# EAGLE board RotaryEncoder (EAGLE 6.4)
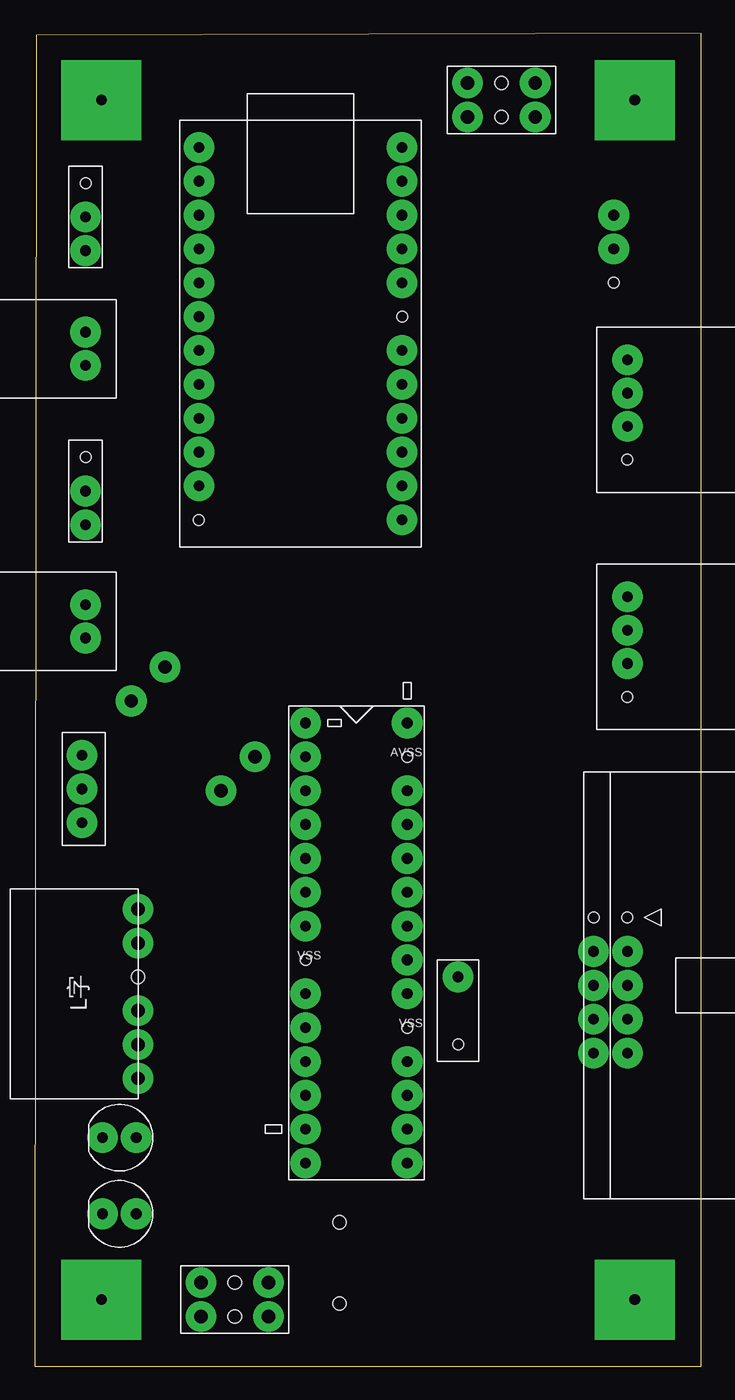
[diagram p0: board, top side]
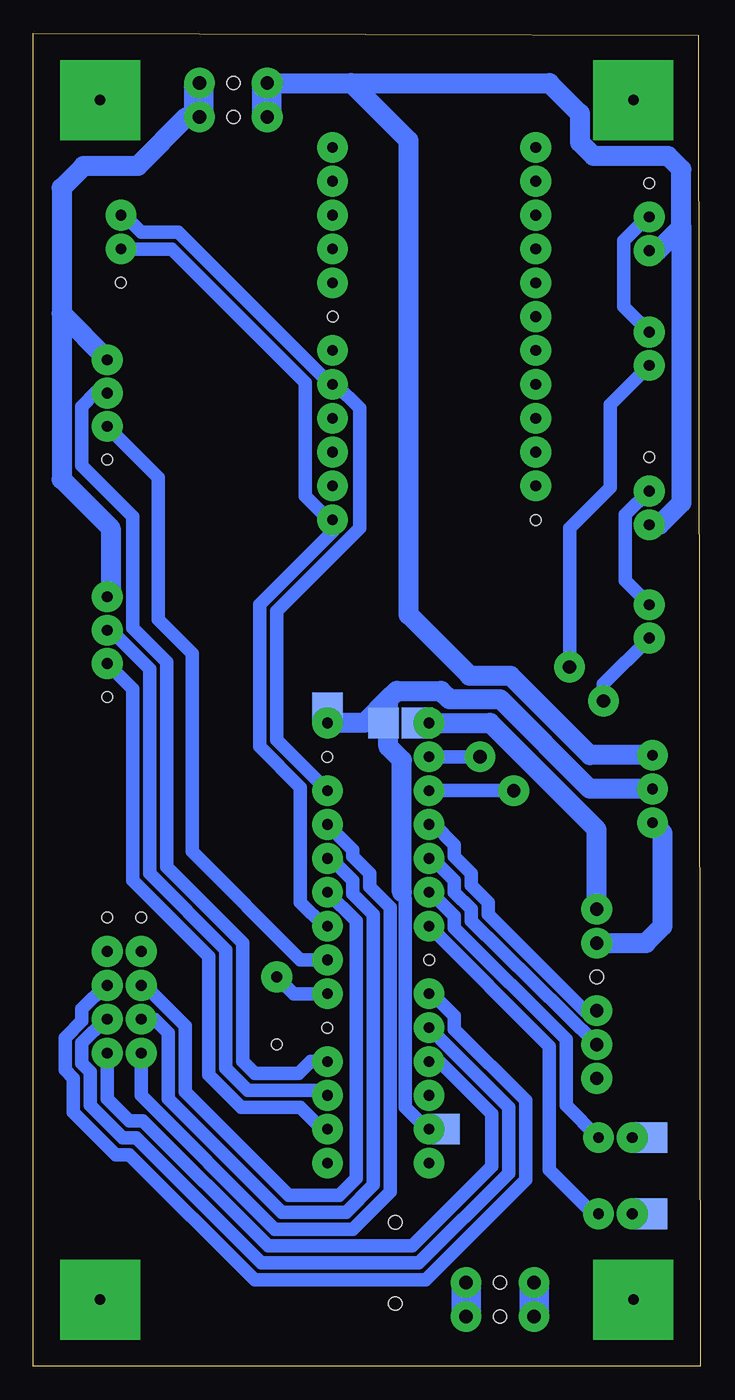
[diagram p1: board, bottom side, seen from below]

Size 50 x 100 mm. Coordinates in mm from the lower left corner, seen from the top.
Outline: 0,0 50,0 50,100 0.13,99.87 0,0
Copper layers (1*16): Top 0.035mm / dielectric 1.5mm / Bottom 0.035mm
Design rules "default *": minimum track width 100mil, minimum drill 24mil, track to track 8mil, track to pad 8mil, pad to pad 8mil, via to via 8mil, smd to smd 8mil, copper to edge 40mil, drill to drill 8mil, minimum pad ring 10mil, minimum via ring 8mil, stop-mask expansion 4mil, vias tented up to drill 0mil, thermal gap 10mil
Holes 1 mm at 22.86,4.7 22.86,10.79
Holes 0.8 mm at 43.43,81.28

## Footprints (pad centres in the part's own frame; a part is rotated, then mirrored left to right if it is on the bottom)
CAPACITOR_1 = drill 0.8 pad 2.3: + -2.54,0 | hole 0.8: 2.54,0
CHIP_CAPACITOR = smd 2.3 x 2.3 bottom: P$1 -1.27,0
CHIP_REGISTER = smd 2.3 x 2.3 bottom: 1 -1.27,0; 2 1.27,0
PIC_28P_2 = drill 0.8 pad 2.3: AVDD 3.81,16.51; MCLR -3.81,16.51; RA0 -3.81,13.97; RA1 -3.81,11.43; RA2 -3.81,-3.81; RA3 -3.81,-6.35; RA4 -3.81,-11.43; RB0 -3.81,8.89; RB1 -3.81,6.35; RB2 -3.81,3.81; RB3 -3.81,1.27; RB4 -3.81,-8.89; RB5 -3.81,-16.51; RB6 3.81,-16.51; RB7 3.81,-13.97; RB8 3.81,-11.43; RB9 3.81,-8.89; RB10 3.81,-1.27; RB11 3.81,1.27; RB12 3.81,3.81; RB13 3.81,6.35; RB14 3.81,8.89; RB15 3.81,11.43; VCAP 3.81,-3.81; VDD -3.81,-13.97 | hole 0.8: -3.81,-1.27; 3.81,-6.35; 3.81,13.97
HIF3BD-10PA = drill 0.8 pad 2.3: 1 5.08,1.27; 2 5.08,-1.27; 3 2.54,1.27; 4 2.54,-1.27; 5 0,1.27; 6 0,-1.27; 7 -2.54,1.27; 8 -2.54,-1.27 | hole 0.8: -5.08,1.27; -5.08,-1.27
PINHEADER_2*3 = drill 1 pad 2.3: 1 -2.54,1.27; 2 -2.54,-1.27; 5 2.54,1.27; 6 2.54,-1.27 | hole 1: 0,1.27; 0,-1.27
SLIDE_SWITCH_3 = drill 0.8 pad 2.3: 1 0,0; 2 -2.54,0; 3 2.54,0
USB_SERIAL(FT232RL) = drill 0.8 pad 2.3: 3V3 7.62,1.27; CB0 7.62,11.43; CB1 7.62,8.89; CB2 -7.62,-13.97; CB3 7.62,-1.27; CB4 -7.62,-11.43; CTS# -7.62,-8.89; DCD# -7.62,-6.35; DSR# -7.62,-3.81; DTR# -7.62,11.43; PU1 7.62,-3.81; PU2 7.62,-6.35; RI# -7.62,1.27; RST 7.62,3.81; RTS# -7.62,8.89; RXD -7.62,3.81; SLD 7.62,-13.97; TXD -7.62,13.97; USB 7.62,-11.43; VCC 7.62,6.35; VCC2 7.62,-8.89; VIO -7.62,6.35 | hole 0.8: -7.62,-1.27; 7.62,13.97
LED_1 = drill 0.8 pad 2.3: A 1.27,0; K -1.27,0 | smd 2.6 x 2.3 bottom: P$3 -2.6,0
PICKIT3_L_REVERSE = drill 1 pad 2.3: 1 6.35,0; 2 3.81,0; 4 -1.27,0; 5 -3.81,0; 6 -6.35,0 | hole 1: 1.27,0
SLIDE_SWITCH_3_A_GND = drill 0.8 pad 2.3: 1 0,0; 2 -2.54,0 | hole 0.8: 2.54,0
XH_SIDE_4P = drill 0.8 pad 2.3: 1 -3.75,0; 2 -1.25,0; 3 1.25,0 | hole 0.8: 3.75,0
XH_SIDE_2P = drill 0.8 pad 2.3: 1 -1.25,0; 2 1.25,0

## Placement (x,y rotation side)
CAPACITOR1  CAPACITOR_VCAP  [CAPACITOR_1]  31.75,26.67 270 top
CHIP_CAPACITOR1  CHIP_CAPACITOR  [CHIP_CAPACITOR]  17.91,17.78 180 top
CHIP_CAPACITOR2  CHIP_CAPACITOR  [CHIP_CAPACITOR]  27.94,50.67 90 top
CHIP_REGISTER1  CHIP_REGISTER  [CHIP_REGISTER]  22.48,48.26 0 top
DSPIC33FJ128MC1  DSPIC33FJ128MC  [PIC_28P_2]  24.13,31.75 0 top
E$1  [HIF3BD-10PA]  43.18,28.57 270 top
E$2  [PINHEADER_2*3]  15,5 0 top
E$3  [PINHEADER_2*3]  35,95 0 top
E$4  [SLIDE_SWITCH_3]  3.56,43.31 90 top
E$5  [USB_SERIAL(FT232RL)]  19.94,77.47 180 top
LED1  LED_1  [LED_1]  6.35,17.14 0 top
LED2  LED_1  [LED_1]  6.35,11.43 0 top
PICKIT1  PICKIT3_L_REVERSE  [PICKIT3_L_REVERSE]  7.75,27.94 90 top
SLIDE_SWITCH4  SLIDE_SWITCH_3_A_GND  [SLIDE_SWITCH_3_A_GND]  3.81,86.23 90 top
SLIDE_SWITCH5  SLIDE_SWITCH_3_A_GND  [SLIDE_SWITCH_3_A_GND]  3.81,65.66 90 top
XH_SIDE_P3  XH_SIDE_P4  [XH_SIDE_4P]  44.45,71.75 270 top
XH_SIDE_P4  XH_SIDE_P4  [XH_SIDE_4P]  44.45,53.98 270 top
XH_SIDE_P5  XH_SIDE_2P  [XH_SIDE_2P]  3.81,76.33 90 top
XH_SIDE_P6  XH_SIDE_2P  [XH_SIDE_2P]  3.81,55.88 90 top

## Library data of the parts
CAPACITOR1 = My_Parts
CHIP_CAPACITOR1 CHIP_CAPACITOR2 CHIP_REGISTER1 E$5 LED1 LED2 PICKIT1 = N_Parts
DSPIC33FJ128MC1 = MicroComputer
E$1 XH_SIDE_P3-XH_SIDE_P6 = N_Connector
E$2 E$3 = N_Pinheader
E$4 SLIDE_SWITCH4 SLIDE_SWITCH5 = N_Switch

## Nets
N$1: DSPIC33FJ128MC1.RB7
N$20: DSPIC33FJ128MC1.RB1 PICKIT1.5
N$21: DSPIC33FJ128MC1.RB2 LED1.A
N$22: DSPIC33FJ128MC1.RB3 LED2.A
N$29: DSPIC33FJ128MC1.RB12
N$35: DSPIC33FJ128MC1.RB13 E$1.4
N$36: DSPIC33FJ128MC1.RB14
S$1: DSPIC33FJ128MC1.RB4 E$1.1
S$2: CAPACITOR1.+ DSPIC33FJ128MC1.VCAP
S$3: DSPIC33FJ128MC1.RB10
S$4: DSPIC33FJ128MC1.RB9
S$5: E$1.2
S$6: DSPIC33FJ128MC1.RB8
S$7: DSPIC33FJ128MC1.VDD
S$8: E$4.2 PICKIT1.2
S$10: DSPIC33FJ128MC1.RA2 E$1.5
S$11: DSPIC33FJ128MC1.RB0 PICKIT1.4
S$13: E$4.1
S$17: E$4.3
S$18: DSPIC33FJ128MC1.MCLR PICKIT1.1
S$19: DSPIC33FJ128MC1.RB11 E$5.TXD
S$20: DSPIC33FJ128MC1.RA1
S$21: SLIDE_SWITCH4.1
S$22: SLIDE_SWITCH4.2
S$23: DSPIC33FJ128MC1.RB15 E$5.RXD
S$25: DSPIC33FJ128MC1.RA0
S$28: DSPIC33FJ128MC1.RA3 E$1.3

## Tracks (layer width: path | path; a pad name or v marks a point on that pad's centre or on a via)
N$1
  Bottom 1: DSPIC33FJ128MC1.RB7 28.32,17.78 29.97,19.43 34.42,19.43 36.83,21.84 36.83,30.73 42.55,36.45 42.55,50.8 44.45,52.7
N$2
  Bottom 1: 44.45,55.24 44.2,55.24 41.27,52.32 41.27,36.96 35.56,31.24 35.56,22.35 33.91,20.7 28.32,20.7
N$20
  Bottom 1: PICKIT1.5 17.14,33.4 17.14,34.29 18.41,35.56 18.41,36.45 20.07,38.1 DSPIC33FJ128MC1.RB1
N$21
  Bottom 1: DSPIC33FJ128MC1.RB2 20.19,35.56 18.41,33.78 18.41,32.89 10.03,24.51 10.03,19.56 LED1.A
N$22
  Bottom 1: LED2.A 8,11.43 11.3,14.73 11.3,24 DSPIC33FJ128MC1.RB3
N$29
  Bottom 1: DSPIC33FJ128MC1.RB12 25.78,33.4 25.78,14.1 27.05,12.83 30.86,12.83 38.61,20.57 38.61,25.53 41.66,28.57 41.91,28.57
N$30  (via drill 0.8 pad 6)
  other vias: 5,5
N$31  (via drill 0.8 pad 6)
  other vias: 45,5
N$32  (via drill 0.8 pad 6)
  other vias: 5,95
N$33  (via drill 0.8 pad 6)
  other vias: 45,95
N$35
  Bottom 1: DSPIC33FJ128MC1.RB13 27.69,38.1 26.04,36.45 26.04,35.43 24.51,33.91 24.51,13.59 26.54,11.56 31.37,11.56 39.88,20.07 39.88,25.02 40.89,26.04 E$1.4
N$36
  Bottom 1: 23.24,34.42 24.77,35.94 24.77,36.96 26.04,38.23 26.04,38.73 DSPIC33FJ128MC1.RB14
S$1
  Bottom 1: E$1.1 44.45,20.07 42.8,18.41 41.78,18.41 32.38,9.02 21.59,9.02 15.62,14.99 15.62,18.92 19.56,22.86 DSPIC33FJ128MC1.RB4
S$2
  Bottom 1: DSPIC33FJ128MC1.VCAP 30.48,27.94 CAPACITOR1.+
S$3
  Bottom 1: DSPIC33FJ128MC1.RB10 29.97,30.48 38.1,38.61 38.1,53.47 40.64,56.01 40.64,66.67 44.45,70.48
S$4
  Bottom 1: DSPIC33FJ128MC1.RB9 29.21,22.86 30.1,21.97 33.4,21.97 34.29,22.86 34.29,31.75 40.01,37.47 40.01,52.83 42.55,55.37 42.55,63.75 46.35,67.56 46.35,72.01 45.34,73.03 44.45,73.03
S$5
  Bottom 1: E$1.2 41.91,20.32 31.88,10.29 26.04,10.29 23.24,13.08 23.24,34.29
S$6
  Bottom 1: 28.19,20.57 DSPIC33FJ128MC1.RB8
S$7
  Bottom 1: DSPIC33FJ128MC1.VDD 20.45,17.78 22.1,19.43 22.1,35.05 22.35,35.31
S$8
  Bottom 1.5: PICKIT1.2 4.06,31.75 2.79,33.02 2.79,40.01 E$4.2
S$10
  Bottom 1: E$1.5 44.58,28.57 46.35,26.8 46.35,25.91 47.62,24.64 47.62,22.23 46.99,21.59 46.99,19.05 43.81,15.88 42.8,15.88 33.4,6.48 20.57,6.48 13.08,13.97 13.08,19.94 18.41,25.27 18.41,26.29 20.07,27.94 DSPIC33FJ128MC1.RA2
S$11
  Bottom 1: PICKIT1.4 8.64,26.67 15.88,33.91 15.88,34.8 17.14,36.07 17.14,36.96 18.41,38.23 18.41,39.12 19.94,40.64 DSPIC33FJ128MC1.RB0
S$12
  Bottom 2.2: 37.59,96.27 37.59,93.73
S$13
  Bottom 1.5: 22.35,35.56 22.35,45.47 23.37,46.48 23.37,50.04 | 23.37,50.04 22.73,50.67 19.43,50.67 18.8,50.04 14.99,50.04 8.26,43.31 E$4.1 | 23.37,50.04 25.15,48.26 27.81,48.26
S$14
  Bottom 2.2: 17.53,6.35 17.53,3.68
S$15
  Bottom 2.2: 12.45,6.35 12.45,3.68
S$16
  Bottom 1.5: 37.47,93.73 38.48,93.73 42.16,90.04 46.23,90.04 47.88,88.39 47.88,78.99 | 47.88,78.99 44.45,75.56 | 47.88,78.99 47.88,66.55 44.2,62.87 44.2,57.91 44.45,57.66
S$17
  Bottom 1.5: 21.84,91.95 21.84,56.39 17.27,51.82 14.22,51.82 8.26,45.85 E$4.3
S$18
  Bottom 1.5: DSPIC33FJ128MC1.MCLR 15.75,48.26 7.75,40.26 PICKIT1.1
S$19  (via drill 0.8 pad 2.3)
  Bottom 1: DSPIC33FJ128MC1.RB11 28.19,33.02 29.97,34.8 29.97,43.43 33.02,46.48 33.02,57.15 27.56,62.61 E$5.TXD 27.81,63.5 29.59,65.28 29.59,73.79 39.62,83.82 v43.43,83.82
S$20
  Bottom 1: DSPIC33FJ128MC1.RA1 13.97,43.18
S$21
  Bottom 1: SLIDE_SWITCH4.1 3.94,86.23 5.71,84.45 5.71,79.5 3.81,77.6 | 3.81,65.66 5.59,63.88 5.59,58.93 3.81,57.15
S$22
  Bottom 1.5: SLIDE_SWITCH4.2 3.17,83.69 1.4,85.47 | 32.51,96.27 26.16,96.27 | 26.16,96.27 21.84,91.95 | 26.16,96.27 11.3,96.27 9.02,93.98 9.02,91.82 8,90.81 2.41,90.81 1.4,89.79 1.4,85.47 | 1.4,85.47 1.4,64.77 3.05,63.12
  Bottom 2.2: 32.51,96.27 32.51,93.73
S$23  (via drill 0.8 pad 2.3)
  Bottom 1: DSPIC33FJ128MC1.RB15 31.75,46.99 31.75,56.64 25.53,62.87 25.53,71.88 27.3,73.66 E$5.RXD 27.69,73.66 39.12,85.09 41.91,85.09 43.18,86.36 v43.43,86.36
S$24  (via drill 1 pad 2.3)
  other vias: 13.97,43.18
S$25  (via drill 1 pad 2.3)
  Bottom 1: DSPIC33FJ128MC1.RA0 v16.51,45.72
S$26  (via drill 1 pad 2.3)
  Bottom 1: 3.81,54.61 7.24,51.18 v7.24,49.91
S$27  (via drill 1 pad 2.3)
  Bottom 1: v9.78,52.45 9.78,62.87 6.73,65.91 6.73,72.14 3.81,75.06
S$28
  Bottom 1: E$1.3 44.58,26.04 46.35,24.26 46.35,22.73 45.72,22.1 45.72,19.56 43.31,17.14 42.29,17.14 32.89,7.75 21.08,7.75 14.35,14.48 14.35,19.43 DSPIC33FJ128MC1.RA3

## Text on the board
tDocu: 3.3V | GND | 5V | 5V | GND | 3.3V